# EAGLE board NEW MD (EAGLE 9.6.2)
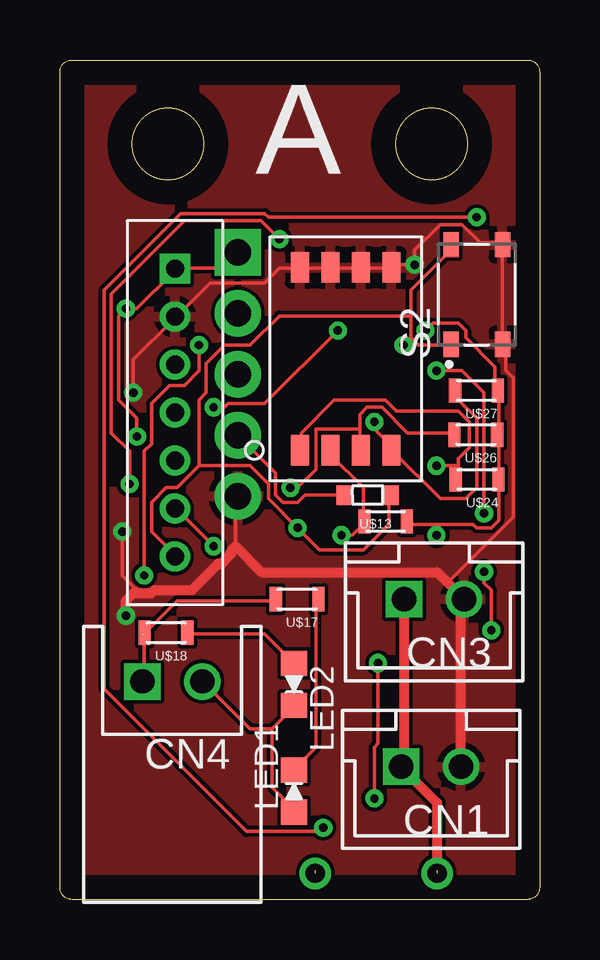
[diagram p0: board, top side]
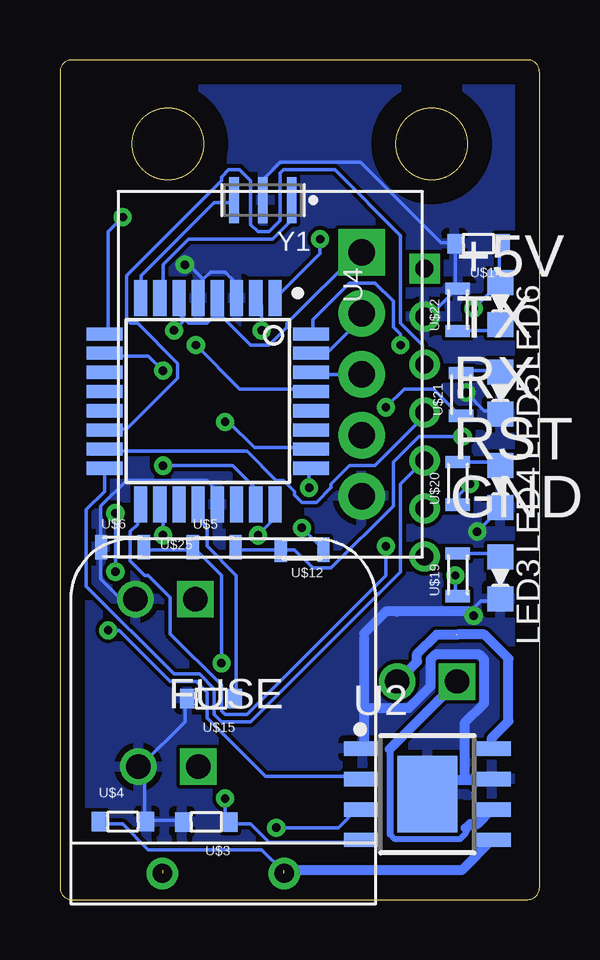
[diagram p1: board, bottom side, seen from below]

Size 20 x 35 mm. Coordinates in mm from the lower left corner, seen from the top.
Outline: 0,34.5 arc-90 0.5,35 19.5,35 arc-90 20,34.5 20,0.5 arc-90 19.5,0 0.5,0 arc-90 0,0.5 0,34.5
Outline: circle at 4.5,31.5 radius 1.5
Outline: circle at 15.5,31.5 radius 1.5
Outline: circle at 4.5,31.5 radius 1.5
Outline: circle at 15.5,31.5 radius 1.5
Copper layers (1*16): Top 0.035mm / dielectric 1.5mm / Bottom 0.035mm
Design rules "default": minimum track width 6mil, minimum drill 0.35mm, track to track 6mil, track to pad 6mil, pad to pad 6mil, via to via 6mil, smd to smd 6mil, copper to edge 40mil, drill to drill 6mil, minimum pad ring 10mil, minimum via ring 8mil, stop-mask expansion 4mil, vias tented up to drill 0mil, thermal gap 10mil

## Footprints (pad centres in the part's own frame; a part is rotated, then mirrored left to right if it is on the bottom)
B2B-XH-A = drill 1.016 square: 1 -1.25,0 | drill 1.016: 2 1.25,0
S2B-XH-A = drill 1.016 square: 1 1.25,0 | drill 1.016: 2 -1.25,0
LED1608 = smd 1.05 x 1.08: A -0.875,0; K 0.875,0
SW_SKRPACE010 = smd 1.05 x 0.65: 1 -2.075,1.075; 2 2.075,1.075; 3 -2.075,-1.075; 4 2.075,-1.075
SOIC127P600X170-9N = smd 1.55 x 0.6: 1 -2.7,1.905; 2 -2.7,0.635; 3 -2.7,-0.635; 4 -2.7,-1.905; 5 2.7,-1.905; 6 2.7,-0.635; 7 2.7,0.635; 8 2.7,1.905 | smd 2.5 x 3.2: 9 0,0
QFP80P900X900X120-32N = smd 1.5 x 0.55: 1 -4.3,2.8; 2 -4.3,2; 3 -4.3,1.2; 4 -4.3,0.4; 5 -4.3,-0.4; 6 -4.3,-1.2; 7 -4.3,-2; 8 -4.3,-2.8; 17 4.3,-2.8; 18 4.3,-2; 19 4.3,-1.2; 20 4.3,-0.4; 21 4.3,0.4; 22 4.3,1.2; 23 4.3,2; 24 4.3,2.8 | smd 0.55 x 1.5: 9 -2.8,-4.3; 10 -2,-4.3; 11 -1.2,-4.3; 12 -0.4,-4.3; 13 0.4,-4.3; 14 1.2,-4.3; 15 2,-4.3; 16 2.8,-4.3; 25 2.8,4.3; 26 2,4.3; 27 1.2,4.3; 28 0.4,4.3; 29 -0.4,4.3; 30 -1.2,4.3; 31 -2,4.3; 32 -2.8,4.3
FUSE3.7A = drill 0.8: P$1 0,0; P$2 5.08,0
CON = smd 0.6 x 0.813: P$1 -1,0; P$2 1,0
1608 = smd 0.508 x 1.016: P$1 -0.889,0; P$2 0.889,0
SI = drill 1.1 pad 1.93 square: P$1 -7.62,0 | drill 1.1 pad 1.93: P$2 -5.08,0; P$3 -2.54,0; P$4 0,0; P$5 2.54,0
4P = smd 0.76 x 1.27: 1.1 0,0; 1.2 0,7.62; 2.1 1.27,0; 2.2 1.27,7.62; 3.1 2.54,0; 3.2 2.54,7.62; 4.1 3.81,0; 4.2 3.81,7.62
SPI = drill 0.75 square: P$1 0,0 | drill 0.75: P$2 2,0; P$3 4,0; P$4 6,0; P$5 8,0; P$6 10,0; P$7 12,0
OSC_CSTCE16M0V53-R0 = smd 0.4 x 1.9: 1 -1.2,0; 2 0,0; 3 1.2,0

## Placement (x,y rotation side)
CN1  [B2B-XH-A]  15.47,5.54 0 top
CN3  [B2B-XH-A]  15.6,12.52 0 top
CN4  [S2B-XH-A]  4.68,9.09 180 top
LED1  LED1608  [LED1608]  9.76,4.52 90 top
LED2  LED1608  [LED1608]  9.76,8.96 270 top
LED3  LED1608  [LED1608]  1.63,13.41 270 bottom
LED4  LED1608  [LED1608]  1.63,17.22 270 bottom
LED5  LED1608  [LED1608]  1.63,21.12 270 bottom
LED6  LED1608  [LED1608]  1.63,24.84 270 bottom
S2  SKRPACE010  [SW_SKRPACE010]  17.38,25.22 90 top
U2  L5973D  [SOIC127P600X170-9N]  4.68,4.39 0 bottom
U4  ATMEGA328P-AU  [QFP80P900X900X120-32N]  13.84,20.78 270 bottom
U$2  FUSE3.7A  [FUSE3.7A]  15.73,1.09 0 bottom
U$3  1608  [CON]  13.9,3.24 180 bottom
U$4  1608  [CON]  17.38,3.25 0 bottom
U$5  R  [1608]  13.57,14.68 0 bottom
U$6  R  [1608]  17.39,14.69 0 bottom
U$7  SI  [SI]  7.42,19.35 270 bottom
U$12  R  [1608]  9.9,14.59 180 bottom
U$13  1608  [CON]  12.83,16.86 180 top
U$14  1608  [CON]  2.55,27.34 180 bottom
U$15  1608  [CON]  13.7,8.38 180 bottom
U$17  R  [1608]  9.89,12.52 180 top
U$18  R  [1608]  4.43,11.12 180 top
U$19  R  [1608]  3.41,13.54 90 bottom
U$20  R  [1608]  3.41,17.35 90 bottom
U$21  R  [1608]  3.27,21.06 90 bottom
U$22  R  [1608]  3.41,24.59 90 bottom
U$23  4P  [4P]  10.01,18.73 0 top
U$24  R  [1608]  17.39,17.51 180 top
U$25  R  [1608]  13.58,15.76 180 top
U$26  R  [1608]  17.34,19.38 180 top
U$27  R  [1608]  17.37,21.22 180 top
U$28  SPI  [SPI]  4.79,26.3 270 top
Y1  CSTCE16M0V53-R0  [OSC_CSTCE16M0V53-R0]  11.54,29.16 180 bottom

## Library data of the parts
CN1 CN3 CN4 = jst-xh
LED1-LED6 = generic
S2 = SKRPACE010; AVAILABILITY: In Stock; DESCRIPTION: Switch Tactile N.O. SPST Button J-Bend 0.05A 16VDC 2.55N SMD Automotive T/R; MF: ALPS; MP: SKRPACE010; PACKAGE: None; PRICE: None
U2 = MD TOSHIBA; AVAILABILITY: In Stock; DESCRIPTION: Buck Switching Regulator IC Positive Adjustable 1.235V 1 Output 2.5A 8-SOIC (0.154, 3.90mm Width) Exposed Pad; MF: STMicroelectronics; MP: L5973D; PACKAGE: HSOP-8 STMicroelectronics; PRICE: None; PURCHASE-URL: https://pricing.snapeda.com/search/part/L5973D/?ref=eda
U4 = ATMEGA328P-AU; AVAILABILITY: In Stock; DESCRIPTION: AVR AVR® ATmega Microcontroller IC 8-Bit 20MHz 32KB (16K x 16) FLASH 32-TQFP (7x7); MF: Microchip Technology; MP: ATMEGA328P-AU; PACKAGE: TQFP-32 Microchip; PRICE: None
U$2 = FUSE 3.7A
U$3 U$4 U$13-U$15 = con1608
U$5 U$6 U$12 U$17-U$22 U$24-U$27 = R 1608
U$7 = プログラム入力
U$23 = DIPスイッチ
U$28 = SPI用PH7ピン
Y1 = CSTCE16M0V53-R0; MANUFACTURER: Murata; MAXIMUM_PACKAGE_HEIGHT: 1.00mm; PARTREV: May 7, 2019; STANDARD: Manufacturer Recommendations

## Nets
+5V: LED6.A U4.4 U4.6 U4.18 U$5.P$2 U$7.P$1 U$12.P$2 U$14.P$1 U$24.P$1 U$25.P$1 U$26.P$1 U$27.P$1 U$28.P$1
A0: U4.23 U$23.1.1 U$24.P$2
A1: U4.24 U$23.2.1 U$25.P$2
A2: U4.25 U$23.3.1 U$26.P$2
A3: U4.26 U$23.4.1 U$27.P$2
D2: U4.32 U$19.P$1
D3: U4.1 U$20.P$1
D4: U4.2 U$21.P$1
GND: CN1.2 CN3.2 LED3.K LED4.K LED5.K S2.3 S2.4 U2.1 U2.7 U2.9 U4.3 U4.5 U4.21 U$3.P$2 U$4.P$2 U$6.P$1 U$7.P$5 U$14.P$2 U$15.P$2 U$22.P$2 U$23.1.2 U$23.2.2 U$23.3.2 U$23.4.2 U$28.P$2 Y1.2
MISO: U4.16 U$28.P$5
MOSI: U4.15 U$28.P$4
N$1: U2.5 U$2.P$2 U$4.P$1
N$2: CN1.1 CN3.1 U$2.P$1
N$3: CN4.2 LED1.A LED2.K U2.8
N$4: CN4.1 U2.6 U$17.P$2 U$18.P$2
N$5: U2.4 U$3.P$1 U$5.P$1 U$6.P$2
N$6: U4.7 Y1.1
N$7: U2.2 U4.10
N$13: U4.20 U$15.P$1
N$15: U$7.P$4 U$13.P$2
N$16: U4.31 U$7.P$2
N$17: U4.30 U$7.P$3
N$18: U2.3 U4.9
N$19: U4.8 Y1.3
N$24: LED2.A U$18.P$1
N$25: LED1.K U$17.P$1
N$31: LED4.A U$20.P$2
N$32: LED3.A U$19.P$2
N$33: LED5.A U$21.P$2
N$37: LED6.K U$22.P$1
RES: S2.1 S2.2 U4.29 U$12.P$1 U$13.P$1 U$28.P$7
SCK: U4.17 U$28.P$6
SS: U4.14 U$28.P$3

## Tracks (layer width: path | path; a pad name or v marks a point on that pad's centre or on a via)
+5V  (via drill 0.35)
  Top 0.152: v3.21,19.3 3.21,20.06 2.45,20.83 2.45,24.33 v2.75,24.64 3.21,24.64 4.73,26.16 U$28.P$1 4.88,26.31 6.71,26.31 7.32,26.92 U$7.P$1 | 15.7,15.64 17.23,15.64 17.38,15.49 17.99,15.49 18.29,15.8 18.29,17.47 U$24.P$1 18.29,17.63 18.29,19.3 U$26.P$1 18.29,19.45 18.29,21.13 U$27.P$1 18.14,21.28 18.14,22.2 16.92,23.42 16.92,23.72 16.62,24.03 15.55,24.03 v15.25,23.72 | 15.7,15.64 14.48,15.64 U$25.P$1 | 15.7,15.64 v15.7,15.19
  Bottom 0.152: U$5.P$2 12.66,14.58 10.83,14.58 U$12.P$2 10.67,14.58 10.22,14.58 9.46,13.82 8.69,13.82 6.1,16.41 6.1,18.24 5.04,19.3 v3.21,19.3 | U$14.P$1 1.68,27.23 1.68,25.86 LED6.A 1.68,25.7 v2.75,24.64 | v15.7,15.19 15.7,16.41 U4.18 | 13.57,24.33 13.57,24.94 U4.4 13.57,24.33 | 13.57,24.33 13.88,24.03 14.64,24.03 14.79,24.18 | 14.79,24.18 14.94,24.33 14.94,24.94 U4.6 | 13.57,24.33 13.27,24.33 12.05,23.11 11.28,23.11 10.52,23.88 10.52,24.03 7.47,27.07 U$7.P$1 | 14.79,24.18 v15.25,23.72
A0  (via drill 0.35)
  Top 0.152: 16.62,18.08 16.62,18.39 17.07,18.85 17.07,19.91 16.62,20.37 14.03,20.37 13.57,20.83 11.44,20.83 10.06,19.45 10.06,18.85 U$23.1.1 | 16.62,18.08 16.62,17.63 U$24.P$2 | 16.62,18.08 v15.7,18.08
  Bottom 0.152: v15.7,18.08 12.81,18.08 11.89,17.17 11.89,16.56 U4.23
A1  (via drill 0.35)
  Top 0.152: U$23.2.1 11.28,18.54 12.66,17.17 12.66,15.8 U$25.P$2 12.66,15.64 12.2,15.19 v11.74,15.19
  Bottom 0.152: v11.74,15.19 11.13,15.8 11.13,16.41 U4.24
A2  (via drill 0.35)
  Top 0.152: 12.5,19.61 12.5,18.85 U$23.3.1 | 12.5,19.61 12.5,20.22 12.81,20.52 13.42,20.52 14.48,19.45 16.31,19.45 U$26.P$2 | v9.61,17.17 9.91,17.17 10.67,17.93 10.67,19.61 12.5,19.61
  Bottom 0.152: v9.61,17.17 9.61,17.93 U4.25
A3  (via drill 0.35)
  Top 0.152: U$27.P$2 16.62,21.13 16.62,20.83 17.38,20.06 17.38,17.17 16.92,16.71 15.86,16.71 13.88,18.69 U$23.4.1 13.88,18.85 13.11,19.61 v13.11,19.91
  Bottom 0.152: v13.11,19.91 12.96,19.91 11.89,18.85 9.61,18.85 U4.26
D2  (via drill 0.35)
  Top 0.152: v3.51,13.51 3.51,18.69 3.82,19 3.82,20.67 4.58,21.44 5.19,21.44 5.8,22.05 v5.8,23.11
  Bottom 0.152: v3.51,13.51 3.51,12.75 U$19.P$1 | v5.8,23.11 5.8,23.57 6.1,23.88 6.1,24.94 6.86,25.7 7.93,25.7 9.46,24.18 9.46,23.72 U4.32
D3  (via drill 0.35)
  Top 0.152: v2.9,17.32 2.9,18.69 2.14,19.45 2.14,25.25 5.19,28.29 8.39,28.29 v9.15,27.53
  Bottom 0.152: v2.9,17.32 3.36,16.86 3.36,16.56 U$20.P$1 | v9.15,27.53 9.15,26.92 10.98,25.09 U4.1
D4  (via drill 0.35)
  Top 0.152: v6.41,20.52 6.86,20.52 7.02,20.67 8.54,20.67 v11.59,23.72
  Bottom 0.152: v6.41,20.52 5.64,21.28 4.43,21.28 3.36,20.22 U$21.P$1 | v11.59,23.72 11.59,24.79 11.74,24.94 U4.2
GND  (via drill 0.35)
  Top 0.152: 11.28,26.31 10.06,26.31 U$23.1.2 9.91,26.31 9.15,26.31 8.54,25.7 6.25,25.7 4.88,24.33 U$28.P$2 4.73,24.18 3.05,22.5 v3.05,21.13 | 11.28,26.31 12.5,26.31 U$23.3.2 12.66,26.31 13.72,26.31 U$23.4.2 13.88,26.47 v14.79,26.47 14.79,27.07 15.86,28.14 16.77,28.14 17.53,27.38 18.45,27.38 S2.4 18.45,27.23 18.45,23.27 S2.3 18.6,23.11 18.6,22.05 18.9,21.74 18.9,15.95 16.16,13.21 | 11.28,26.31 U$23.2.2 | v2.6,15.34 2.6,13.51 3.21,12.9 5.49,12.9 5.51,12.91 | 7.32,14.73 7.32,16.71 U$7.P$5 | 16.77,12.45 CN3.2 16.77,12.6 16.16,13.21 | 15.86,13.51 16.03,13.33 16.16,13.21
  Top 0.406: CN1.2 16.73,12.4 16.77,12.45 | v2.75,11.84 2.75,12.45 3.14,12.84 3.21,12.78 3.82,12.78 3.94,12.9 5.49,12.9 | 5.51,12.91 6.59,14 6.71,14 7.14,14.43 7.14,14.55 7.32,14.73 8.41,13.64 15.73,13.64 15.86,13.51 CN3.2 16.04,13.33 16.03,13.33
  Bottom 0.152: 14.03,25.86 14.18,25.7 14.18,25.09 U4.5 | 14.03,25.86 13.72,26.16 13.11,26.16 12.66,25.7 12.66,25.09 U4.3 | 14.03,25.86 14.64,26.47 v14.79,26.47 | v3.05,21.13 2.29,20.37 1.68,20.37 LED5.K | U$28.P$2 4.73,24.18 3.51,25.4 U$22.P$2 3.51,25.55 3.51,27.23 U$14.P$2 3.66,27.38 4.12,27.38 7.47,30.73 10.83,30.73 11.44,30.12 11.44,29.21 Y1.2 | U2.7 1.99,4.98 3.05,4.98 3.41,4.98 4.12,4.98 4.58,4.52 U2.9 | 5.95,12 2.89,12 2.45,12.45 1.68,12.45 LED3.K | 7.32,11.09 7.32,10.87 | 7.32,6.35 U2.1 | v2.6,15.34 1.68,16.25 LED4.K | U$3.P$2 14.94,3.3 16.31,3.3 U$4.P$2 16.47,3.3 16.47,5.28 16.62,5.43 CN1.2 16.62,5.59 14.79,7.42 14.79,8.33 U$15.P$2 | CN3.2 16.92,12.6 17.53,12.6 18.29,13.36 18.29,14.58 U$6.P$1 18.29,14.73 18.29,16.41 17.23,17.47 13.88,17.47 13.57,17.17 13.57,16.56 U4.21
  Bottom 0.406: U2.7 2.03,4.98 3.41,4.98 | 7.32,8.02 7.27,7.97 5.47,7.97 4.55,8.89 4.55,10 4.34,10.21 2.52,10.21 2.31,10 2.31,8.18 3.11,7.39 3.11,5.03 3.05,4.98 | 7.32,8.02 7.32,6.35 | 2.89,12 2.75,11.86 v2.75,11.84 2.91,12 5.95,12 6.41,12 7.32,11.09 | 7.32,10.87 7.32,8.02
  pour Bottom: -2.94,36.27 -2.94,-0.56 22.46,-0.56 22.46,36.27
  pour Top: -4.21,36.27 -4.21,-1.83 23.73,-1.83 23.73,37.54 -4.21,37.54
MISO
  Bottom 0.152: U4.16 18.14,17.93 18.14,17.02 18.9,16.25 18.9,13.05 15.25,9.4 14.18,9.4 13.57,8.79 13.57,7.72 13.27,7.42 12.05,7.42 5.8,13.66 5.8,17.32 4.88,18.24 U$28.P$5
MOSI
  Bottom 0.152: U4.15 17.99,18.69 12.2,18.69 10.98,17.47 10.67,17.47 10.22,17.02 10.22,16.86 9.91,16.56 9.3,16.56 8.69,17.17 8.69,17.32 7.93,18.08 6.86,18.08 4.73,20.22 U$28.P$4
N$1  (1 unrouted)
  Bottom 0.152: U$4.P$1 18.29,3.15 17.38,3.15 16.31,2.08 11.59,2.08 10.67,1.17 U$2.P$2
  Bottom 0.406: U2.5 3.25,1.22 10.65,1.22
N$2  (1 unrouted)
  Top 0.152: 14.33,5.59 CN1.1
  Top 0.406: CN3.1 14.35,5.61 14.33,5.59 | CN1.1 15.73,4.03 15.73,1.22
N$3  (1 unrouted)
  Top 0.152: 8.85,7.11 8.85,4.67 9.76,3.76 LED1.A | 8.85,7.11 9.76,8.02 LED2.K | 8.85,7.11 7.93,7.11 5.95,9.09 CN4.2
  Bottom 0.406: U2.8 1.98,6.75 1.3,7.43 1.3,10.05 2.3,11.05 3.43,11.05 | CN4.2 5.11,9.92 5.11,10.23 4.29,11.05 3.46,11.05
N$4
  Top 0.152: CN4.1 3.51,9.09 3.51,11.07 U$18.P$2 3.66,11.23 4.88,12.45 9,12.45 U$17.P$2
  Bottom 0.152: 3.01,2.89 3.36,2.54 6.1,2.54 6.25,2.69 6.25,5.79
  Bottom 0.203: 6.25,6.27 6.18,6.21 6.18,2.69 6.04,2.54 3.32,2.54 3.01,2.85 3.01,2.89
  Bottom 0.254: 3.07,2.97 3.07,2.75 3.31,2.51 6.05,2.51 6.25,2.72 6.25,6.27
  Bottom 0.406: CN4.1 6.25,6.27 | U2.6 2.59,3.14 2.9,3.14 3.07,2.97
N$5  (via drill 0.35)
  Top 0.152: v13.27,9.85 13.27,6.5 13.11,6.35 v13.11,4.21
  Bottom 0.152: U$6.P$2 16.47,14.58 14.48,14.58 U$5.P$1 14.33,14.58 13.27,13.51 v13.27,9.85 | U2.4 7.47,2.39 11.28,2.39 12.05,3.15 12.81,3.15 U$3.P$1 12.96,3.3 13.11,3.45 v13.11,4.21
N$6
  Bottom 0.152: U4.7 15.7,25.09 15.7,26.47 14.64,27.53 11.13,27.53 10.37,28.29 10.37,29.06 Y1.1
N$7  (via drill 0.35)
  Top 0.152: v15.7,22.05 16.77,22.05 17.68,21.13 v17.68,16.1 | v17.68,13.66 17.68,13.21 17.99,12.9 v17.99,11.23
  Bottom 0.152: v15.7,22.05 16.31,22.66 17.99,22.66 U4.10 | v17.68,13.66 v17.68,16.1 | v17.99,11.23 17.53,11.23 15.4,9.09 14.33,9.09 13.88,8.64 13.88,7.57 11.44,5.13 7.47,5.13 U2.2
N$13
  Bottom 0.152: U$15.P$1 12.66,8.48 12.66,13.51 13.88,14.73 13.88,15.49 14.18,15.8 14.18,16.41 U4.20
N$15
  Top 0.152: U$13.P$2 10.22,16.86 9.91,16.56 9.3,16.56 9,16.86 9,17.78 U$7.P$4
N$16
  Bottom 0.152: U4.31 9.46,22.81 8.85,22.81 7.32,24.33 U$7.P$2
N$17
  Bottom 0.152: U$7.P$3 9.46,21.89 U4.30
N$18  (via drill 0.35)
  Top 0.152: v17.38,28.45 8.69,28.45 8.54,28.6 5.04,28.6 1.84,25.4 1.84,8.79 7.78,2.84 10.83,2.84 v10.98,3
  Bottom 0.152: v17.38,28.45 17.99,27.84 17.99,23.72 U4.9 | v10.98,3 8.39,3 7.63,3.76 U2.3
N$19
  Bottom 0.152: U4.8 16.62,25.09 16.62,26.01 13.57,29.06 12.81,29.06 Y1.3
N$24
  Top 0.152: U$18.P$1 5.34,11.07 8.54,11.07 9.76,9.85 LED2.A
N$25
  Top 0.152: U$17.P$1 10.67,12.45 10.67,6.35 9.76,5.43 LED1.K
N$31
  Bottom 0.152: U$20.P$2 1.68,18.24 LED4.A
N$32
  Bottom 0.152: U$19.P$2 1.68,14.43 LED3.A
N$33
  Bottom 0.152: U$21.P$2 3.21,22.05 1.68,22.05 LED5.A
N$37
  Bottom 0.152: U$22.P$1 3.36,23.72 1.84,23.72 1.68,23.88 LED6.K
RES  (via drill 0.35)
  Top 0.152: 14.64,23.42 14.94,23.11 16.16,23.11 S2.1 | 14.64,24.33 14.64,25.4 16.16,26.92 16.16,27.23 S2.2 | 14.64,24.33 14.64,23.42 | 14.64,23.42 v14.33,23.11 | 5.8,18.08 7.93,18.08 8.69,17.32 8.69,16.71 v9.91,15.49 10.83,14.58 12.66,14.58 13.72,15.64 13.72,16.86 U$13.P$1 | 5.8,18.08 4.88,17.17 4.43,17.17 3.82,16.56 3.82,15.34 4.73,14.43 U$28.P$7 | 14.64,24.33 9.15,24.33 7.93,23.11 6.86,23.11 6.1,22.35 6.1,21.13 5.8,20.83 5.8,18.08
  Bottom 0.152: v14.33,23.11 12.5,21.28 9.61,21.28 U4.29 | v9.91,15.49 U$12.P$1
SCK  (via drill 0.35)
  Top 0.152: v6.41,14.73 4.88,16.25 U$28.P$6
  Bottom 0.152: v6.41,14.73 6.41,13.51 12.2,7.72 13.11,7.72 13.27,7.87 13.27,8.94 15.4,11.07 15.4,12.6 16.31,13.51 16.47,13.51 17.07,14.12 17.07,15.34 16.77,15.64 16.77,16.41 U4.17
SS
  Bottom 0.152: U4.14 17.99,19.61 17.23,19.61 15.09,21.74 15.09,22.35 16.77,24.03 17.07,24.03 17.23,24.18 17.23,26.01 13.27,29.97 13.27,30.12 12.96,30.43 12.5,30.43 12.05,29.97 12.05,28.14 11.74,27.84 11.28,27.84 10.83,28.29 10.83,30.28 10.67,30.43 8.54,30.43 5.8,27.68 5.8,24.03 4.88,23.11 4.88,22.35 U$28.P$3

## Text on the board
tPlace: A